# Altium PCB PCB.pcbdoc
Units mil, origin at the board's own origin, x right, y up, seen from the top; angles counter-clockwise.
Board outline 4690 x 5260 mil, 2 copper layers (Top Layer, Bottom Layer); 44 components, 55 nets, 158 pads, 60 vias.
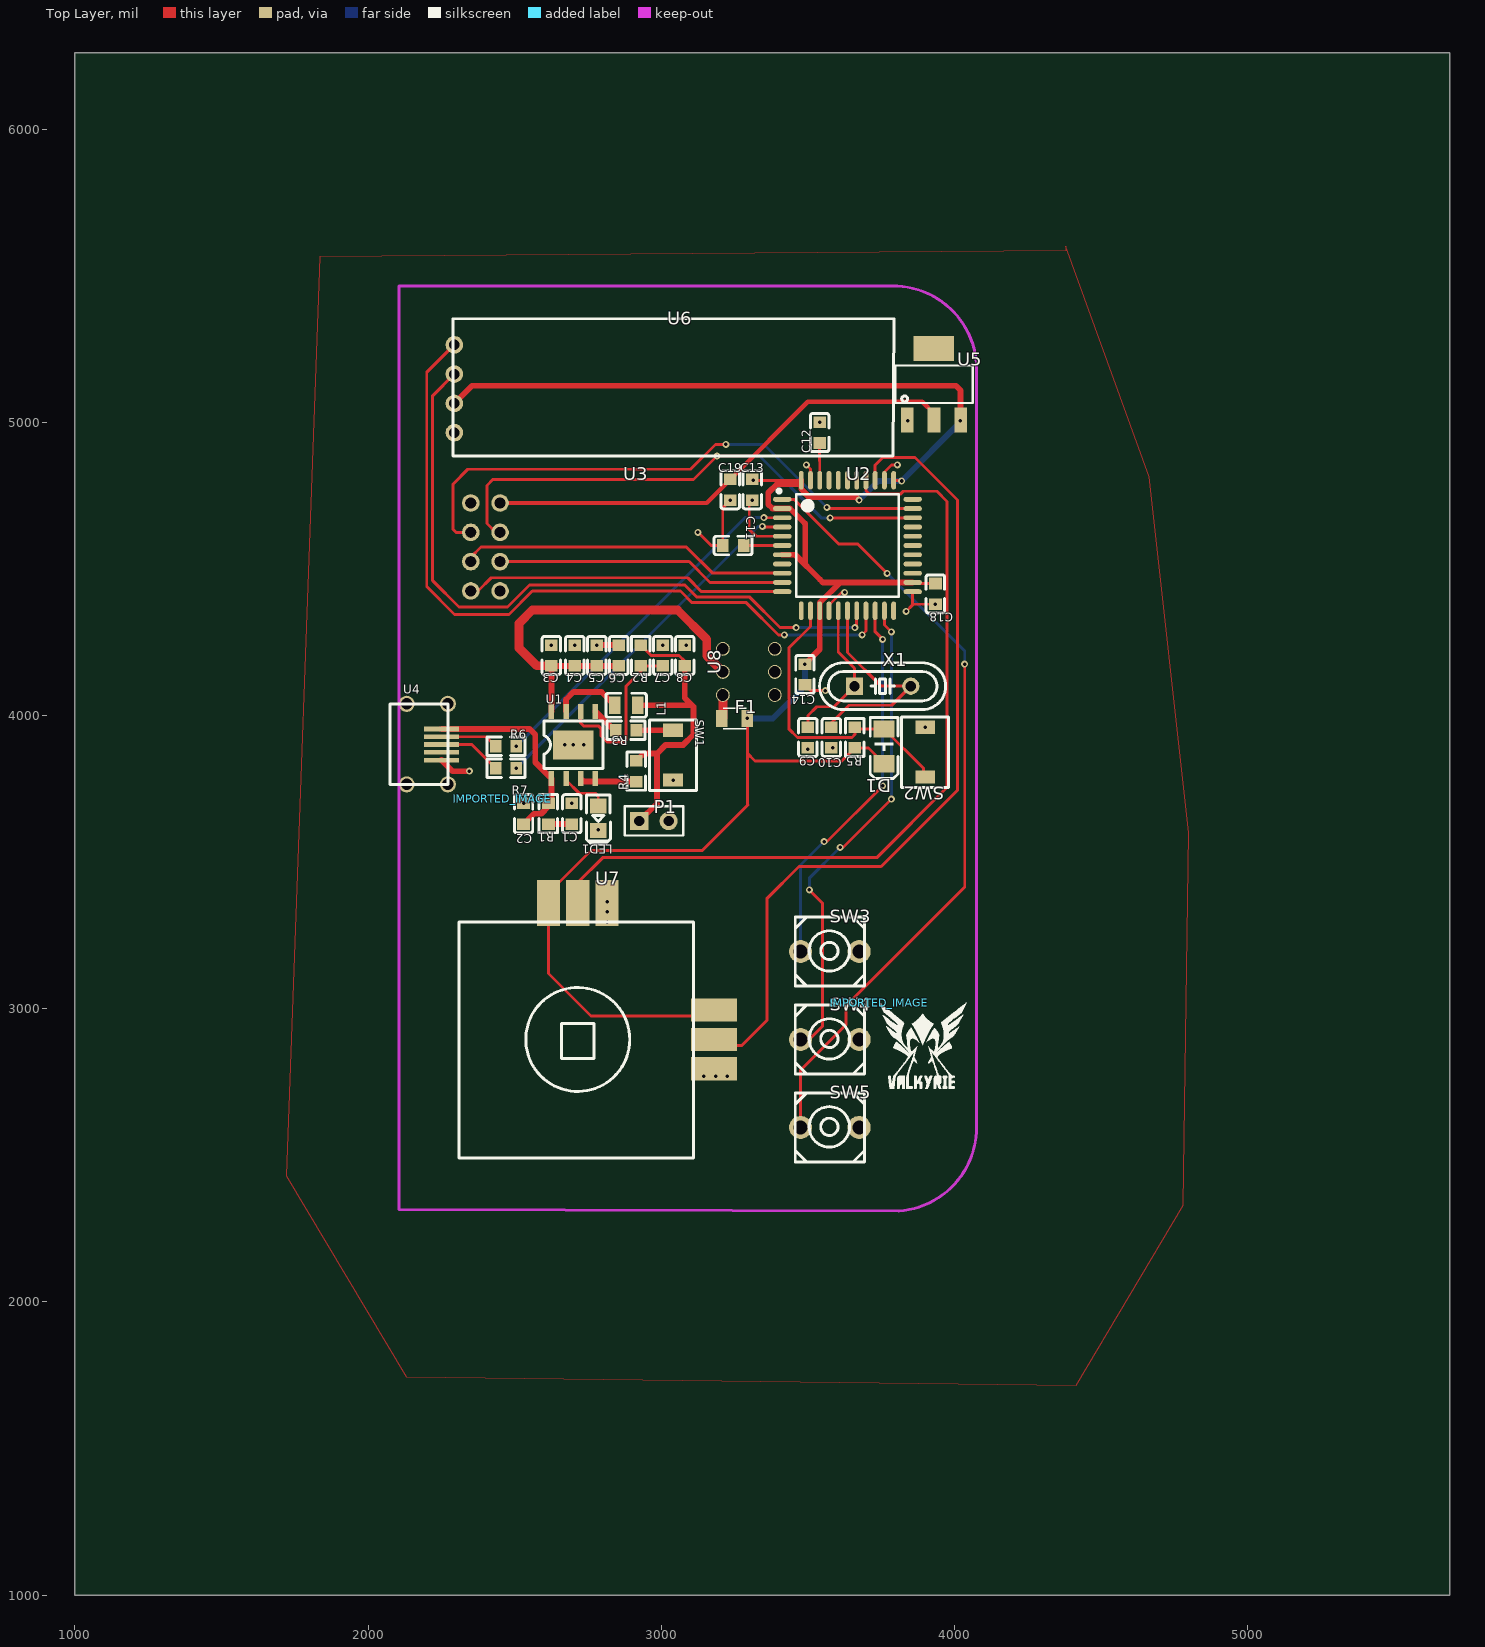
[diagram p0: Top Layer view]
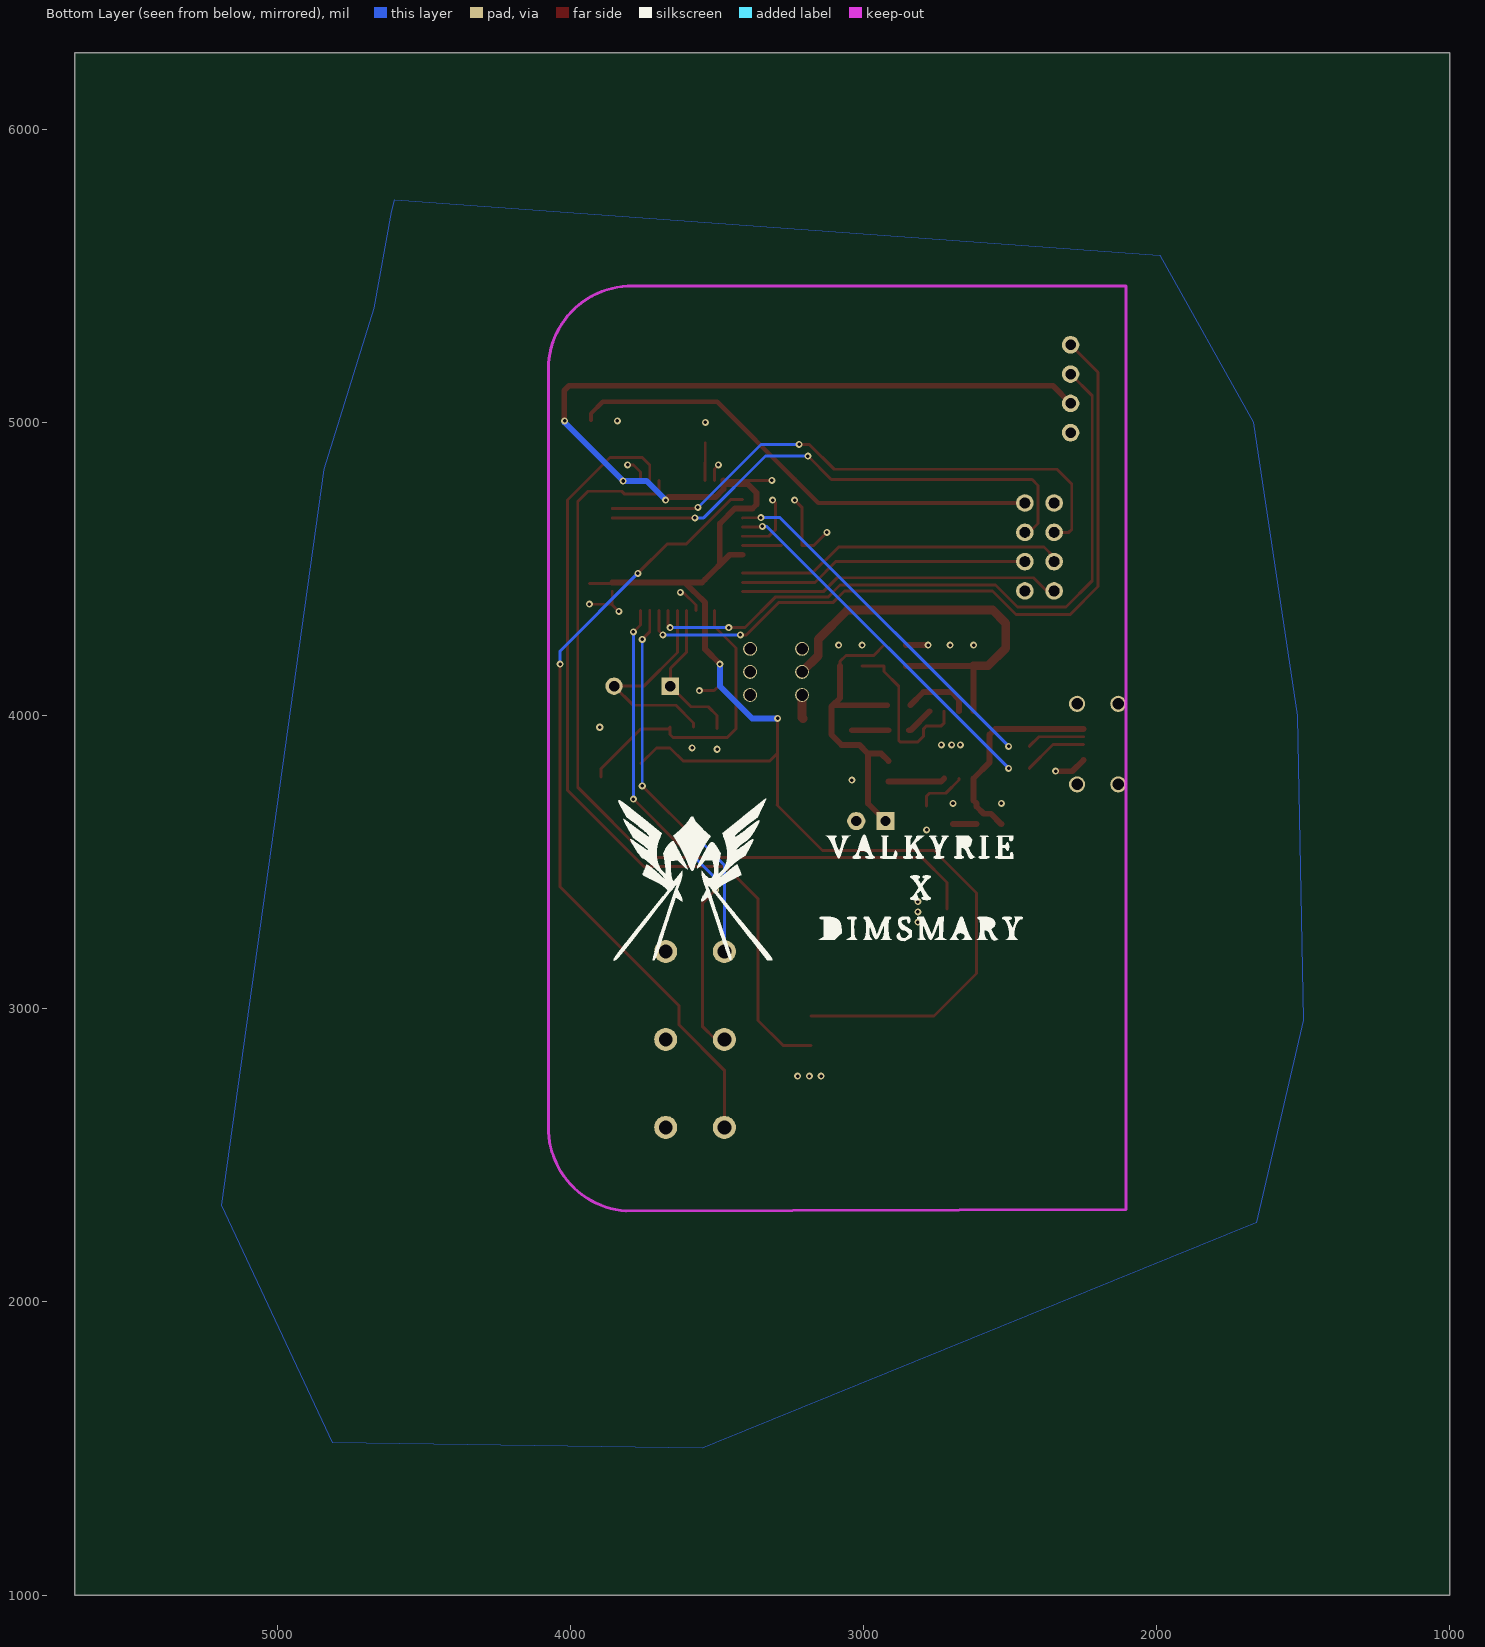
[diagram p1: Bottom Layer view, seen from below]

## Layer stack, top to bottom
Top Layer: signal copper (thickness not stored)
Dielectric: dielectric 12.6, FR-4, Dk 4.8
Bottom Layer: signal copper (thickness not stored)

## Board outline
5690,1000 1000,1000 1000,6260 5690,6260

## Components (designator, comment, footprint, x,y, rotation, side; value= is the part's Value field where it differs from the comment)
C1 "10u" C0603 2695,3665 r90 top
C2 "10u" C0603 2530,3665 r90 top
C3 "22u" C0603 2625,4205 r90 top
C4 "22u" C0603 2705,4205 r90 top
C5 "22u" C0603 2780,4205 r90 top
C6 "22u" C0603 2855,4205 r90 top
C7 "22u" C0603 3005,4205 r270 top
C8 "22u" C0603 3080,4205 r270 top
C9 "22p" C0603 3500,3925 r90 top
C10 "22p" C0603 3580,3925 r90 top
C11 "1u" C0603 3245,4580 r180 top
C12 "100n" C0603 3540,4965 r90 top
C13 "10u" C0603 3310,4770 r90 top
C14 "100n" C0603 3490,4140 r90 top
C18 "22U" C0603 3935,4415 r90 top
C19 "22U" C0603 3235,4770 r90 top
D1 "1N4448" LED1206-R-RD 3760,3895 r90 top
F1 "Glass tube fuse2A 3F 250VAC" FUSE_SMD1206_REFLOW 3250,3990 r0 top
IMPORTED_IMAGE "IMPORTED_IMAGE" IMPORTED_IMAGE 2457,3715.45 r0 top
IMPORTED_IMAGE "IMPORTED_IMAGE" IMPORTED_IMAGE 3743.57,3020.95 r0 top
L1 "1u" C0805 2880,4035 r0 top
LED1 "LTST-C170TBKT" LED-0805 2785,3650 r90 top
P1 "BAT" HDR-1X2/2.54 2975,3640 r0 top
R1 "2R" R0603 2615,3665 r270 top
R2 "0.5R" R0603 2930,4205 r90 top
R3 "10k" R0603 2880,3950 r180 top
R4 "1k" R0603 2915,3810 r270 top
R5 "10K" R0603 3660,3925 r270 top
R6 "22R" R0603 2470,3895 r0 top
R7 "22R" R0603 2470,3820 r0 top
SW1 "EVQ22705R" SMT_BUTTON 3040,3865 r0 top
SW2 "EVQ22705R" SMT_BUTTON 3900,3875 r0 top
SW3 "EVQ22705R" KEY-6.0*6.0-4 3575,3195 r0 top
SW4 "EVQ22705R" KEY-6.0*6.0-4 3575,2895 r0 top
SW5 "EVQ22705R" KEY-6.0*6.0-4 3575,2595 r0 top
U1 "IP5306" ESOP-8_L4.9-W3.9-P1.27-LS6.0-BL-EP 2700,3900 r0 top
U2 "ATMEGA32U4-AU" QFP-44_10X10X08P 3635,4580 r0 top
U3 "NRF24L01" NRF_ 2450,4625 r0 top
U4 "USB_PWR" MICROUSB 2075,4040 r0 top
U5 "ASM1117" SOT223 3930,5125 r0 top
U6 "SSD1306_128x32 I2C OLED 0.96\"" SSD1306_128X32 2290,4885 r0 top
U7 "Potentiometer_MICRO" POINTMERER_MICRO 2615,3295 r0 top
U8 "6FOOT_SWITCH" 6FOOT_SWITCH 3210,4070 r90 top
X1 "16MHz" HC-49S 3755,4100 r0 top

## Footprints (in the part's own frame and the unit in brackets; to place one, negate y for a bottom-side part, rotate by r counter-clockwise, add the part's x,y. Pads: shape width x height; smd on the part's side, far side on the other; paste and mask are expansions set on the pad)
6FOOT_SWITCH [mm]
  round 1.2 hole 1: 1(0,0) 2(2,0) ""(0,-4.5) ""(2,-4.5) ""(4,-4.5) ""(4,0)
C0603 [mm]
  rect 1x1.1 smd: 1(-0.9,0) 2(0.9,0)
  silkscreen extent -1.65,-0.8 1.65,0.8
C0805 [mm]
  rect 1x1.55 smd: 1(-1,0) 2(1,0)
  silkscreen extent -1.75,-1.04 1.75,1.04
ESOP-8_L4.9-W3.9-P1.27-LS6.0-BL-EP [mil]
  rect 18.9x51.18 smd: 1(-75,-114.5) 2(-25,-114.5) 3(25,-114.5) 4(75,-114.5) 5(75,114.5) 6(25,114.5) 7(-25,114.5) 8(-75,114.5)
  rect 137.8x98.42 smd: 9(0,0)
  silkscreen extent -100,-81 100,81
FUSE_SMD1206_REFLOW [mm]
  rect 1x1.5 smd: 1(-1.1,0) 2(1.1,0)
  silkscreen extent -1,-0.87 1,0.87
HC-49S [mm]
  rect 1.5x1.5 hole 0.9: 1(-2.438,0)
  round 1.5 hole 0.9: 2(2.438,0)
  silkscreen extent -5.46,-2.03 5.46,2.03
HDR-1X2/2.54 [mil]
  rect 62x62 hole 35: 1(-50,0)
  round 62 hole 35: 2(50,0)
  silkscreen extent -100,-49 100,50
IMPORTED_IMAGE [mil]
KEY-6.0*6.0-4 [mm]
  round 2 hole 1.2: 1(2.54,0) 2(-2.54,0)
  silkscreen extent -3,-3 3,3
LED1206-R-RD [mm]
  rect 1.5x1.8 smd: 1(1.5,0) 2(-1.5,0)
  silkscreen extent -2.8,-1.2 2.5,1.2
LED-0805 [mil]
  rect 51.2x55.1 smd: 1(41.35,0) 2(-41.35,0)
  silkscreen extent -88,-41 78,40
MICROUSB [mm]
  rect 3x0.4 smd: 1(4.445,-2.178) 2(4.445,-2.853) 3(4.445,-3.528) 4(4.445,-4.203) 5(4.445,-4.878)
  round 1.4 hole 1: ""(1.428,-6.985) ""(1.428,0) ""(5,-6.985) ""(5,0)
  silkscreen extent 0,-7 5,0
NRF_ [mil]
  round 60 hole 36 slot 36.2 at 0 deg: 1(-100,100) 2(0,100) 3(-100,0) 4(0,0) 5(-100,-100) 6(0,-100) 7(-100,-200) 8(0,-200)
POINTMERER_MICRO [mm]
  rect 2x4 smd: 1(0,1.651) 2(2.54,1.651) 3(5.08,1.651)
  rect 4x2 smd: 4(14.351,-7.62) 5(14.351,-10.16) 6(14.351,-12.7)
  silkscreen extent -7.75,-20.45 12.57,0
QFP-44_10X10X08P [mm]
  oval 1.597x0.42 smd: 1(-5.65,4) 2(-5.65,3.2) 3(-5.65,2.4) 4(-5.65,1.6) 5(-5.65,0.8) 6(-5.65,0) 7(-5.65,-0.8) 8(-5.65,-1.6) 9(-5.65,-2.4) 10(-5.65,-3.2) 11(-5.65,-4) 23(5.65,-4) 24(5.65,-3.2) 25(5.65,-2.4) 26(5.65,-1.6) 27(5.65,-0.8) 28(5.65,0) 29(5.65,0.8) 30(5.65,1.6) 31(5.65,2.4) 32(5.65,3.2) 33(5.65,4)
  oval 0.42x1.597 smd: 12(-4,-5.65) 13(-3.2,-5.65) 14(-2.4,-5.65) 15(-1.6,-5.65) 16(-0.8,-5.65) 17(0,-5.65) 18(0.8,-5.65) 19(1.6,-5.65) 20(2.4,-5.65) 21(3.2,-5.65) 22(4,-5.65) 34(4,5.65) 35(3.2,5.65) 36(2.4,5.65) 37(1.6,5.65) 38(0.8,5.65) 39(0,5.65) 40(-0.8,5.65) 41(-1.6,5.65) 42(-2.4,5.65) 43(-3.2,5.65) 44(-4,5.65)
  silkscreen extent -6.08,-4.45 4.45,4.87
R0603 [mm]
  rect 1x1.1 smd: 1(-0.9,0) 2(0.9,0)
  silkscreen extent -1.65,-0.8 1.65,0.8
SMT_BUTTON [mil]
  rect 66.93x45.28 smd: 1(0,85) 2(0,-85)
  silkscreen extent -80,-120 80,120
SOT223 [mil]
  rect 43x85 smd: 1(-91,-117) 2(0,-117) 3(91,-117)
  rect 138x85 smd: 4(0,127)
  silkscreen extent -132,-59 132,69
SSD1306_128X32 [mil]
  round 60 hole 36: 1(3.9,379.7) 2(3.9,279.7) 3(3.9,179.7) 4(3.9,79.7)
  silkscreen extent 0,0 1504,468

## Via types
v1: diameter 24, hole 12, Top Layer to Bottom Layer, 60 vias

## Nets (pads, with @x,y where several pads share a name; then routed paths per layer and width w, separated by ;. In a path a pad name is that pad's centre, name@x,y a point inside that pad or via, vN(x,y) a via of type N, cw(c..) or ccw(c..) an arc to the next point about the centre after c; other vN are vias at no path point)
3.3V: C19.2 U3.2 U5.2 | length 1661.6
  Top Layer w15: U3.2 3155,4725 C19.2 3499.6,5070 3890,5070 3930,5030 U5.2
5V: C13.2 C14.2 C18.2 D1.2 F1.2 R5.2 U2.2 U2.7 U2.14 U2.24 U2.34 U2.44 U5.3 U6.3 U7.1 U7.4 | length 7098
  Top Layer w10: U7.4@3180,2975 2760,2975 2615,3120 2615,3340 2615,3395 2760,3540 3140,3540 3295,3695 3293.31,3696.69 v1(3293.31,3990) 3293.31,3871.69 3320,3845 3615.44,3845 R5.2 3706.38,3889.56 D1.2 ; C13.2 v1(3313,4802.44) U2.44 ; U2.34 3817.56,4802.44 v1(3820,4800) ; U2.24 3861.02,4450.44 C18.2
  Top Layer w20: U6.3 2354.2,5125 4005,5125 4021,5109 U5.3 ; U2.7 3456.5,4548.5 3541,4464 3551,4454 3640.2,4454 ; C14.2 3540.51,4225.95 U2.14 ; 3490.78,4514.22 3490.78,4645.78 3490,4655 3439.02,4705.98 U2.2 3379.02,4705.98 3365,4720 3365,4760 3395,4790 3465.08,4790 U2.44 3477.52,4772.48 3505,4745 3665,4745 v1(3675,4735) ; U2.14 3540.5,4385.5 3611,4454 U2.24
  Bottom Layer w20: v1(3293.31,3990) 3380,3990 3490,4100 v1(3490,4175) ; v1(3675,4735) 3740,4800 v1(3820,4800) 4020,5000 v1(4020,5005)
A0: U2.36 U7.5 | length 2826.7
  Top Layer w10: U7.5@3180,2875 3275,2875 3360,2960 3360,3375 3470,3485 3750,3485 4010,3745 4010,4735 3865,4880 3755,4880 3729.5,4854.5 U2.36
A1: U2.37 U7.2 | length 2795.7
  Top Layer w10: U7.2@2715,3340 2715,3430 2800,3515 3735,3515 3975,3755 3975,4730 3940,4765 3825,4765 3815,4755 3710,4755 3697.99,4767.01 U2.37
BAT+: C8.2 L1.2 P1.1 R2.2 R4.1 | length 1108
  Top Layer w10: R2.2 2965.43,4205 3060,4205 3080,4185 C8.2
  Top Layer w20: R4.1 2939.56,3870 2985,3870 ; L1.2 3105,4035 ; P1.1 2985,3700 2985,3870 ; C8.2 3080,4060 3105,4035 ; 2985,3870 3015,3900 3075,3900 3110,3935 3110,4030 3105,4035
D0: SW3.2 U2.20 | length 1295
  Top Layer w10: v1(3555,3570) 3565,3570 v1(3755,3760) ; U2.20 3729.49,4285.51 v1(3755,4260)
  Bottom Layer w10: SW3.2 3475,3490 v1(3555,3570) ; v1(3755,3760) v1(3755,4260)
D1: SW4.2 U2.21 | length 1661.6
  Top Layer w10: SW4.2 3505,2895 3550,2940 3550,3360 v1(3505,3405) ; v1(3610,3550) 3620,3550 v1(3785,3715) ; U2.21 3760.98,4309.02 v1(3785,4285)
  Bottom Layer w10: v1(3505,3405) 3505,3445 v1(3610,3550) ; v1(3785,3715) v1(3785,4285)
D4: U2.25
D5: U2.31 U3.4 | length 1768.5
  Top Layer w10: U3.4 2435,4625 2405,4655 2405,4785 2425,4805 3110,4805 v1(3190,4885) ; v1(3575.51,4674.49) U2.31
  Bottom Layer w10: v1(3190,4885) 3335,4885 3545.5,4674.5 v1(3575.51,4674.49)
D7: SW5.2 U2.1 | length 2693.7
  Top Layer w10: U2.1 3452.52,4737.48 3605,4585 3670,4585 v1(3770,4485) ; SW5.2 3475,2790 3630,2945 3630,3010 4035,3415 v1(4035,4175)
  Bottom Layer w10: v1(3770,4485) 4035,4220 v1(4035,4175)
D9: U2.29
D13: U2.32 U3.3 | length 1933.2
  Top Layer w10: U3.3 2300,4625 2290,4635 2290,4790 2340,4840 3100,4840 3185,4925 v1(3220,4925) ; v1(3565,4710) 3569.02,4705.98 U2.32
  Bottom Layer w10: v1(3220,4925) 3350,4925 v1(3565,4710)
DATA_M: R6.2 U2.3 | length 1230.7
  Top Layer w10: v1(3350,4675) U2.3
  Bottom Layer w10: v1(2505,3895) 3285,4675 v1(3350,4675)
DATA_P: R7.2 U2.4 | length 1250.1
  Top Layer w10: v1(3345,4645) 3347.01,4642.99 U2.4
  Bottom Layer w10: v1(2505,3820) 3330,4645 v1(3345,4645)
GND: C1.2 C2.2 C3.2 C4.2 C5.2 C6.2 C7.1 C8.1 C9.1 C10.1 C11.2 C12.2 C13.1 C14.1 C18.1 C19.1 LED1.2 P1.2 SW1.2 SW2.1 SW3.1 SW4.1 SW5.1 U1.9 U2.5 U2.15 U2.23 U2.35 U2.43 U3.1 U4.5 U5.1 U6.4 U7.3 U7.6 | length 1176.3
  Top Layer w10: v1(3125,4625) 3170,4580 C11.2 3209.56,4709.13 C19.1 ; C13.1 3300,4724.57 3300,4635 3323.5,4611.5 U2.5 ; C14.1 3509.57,4085 v1(3560,4085) ; v1(3495,4855) 3509.02,4840.98 U2.43 ; U2.15 3572.01,4377.01 3615,4420 v1(3625,4420) ; U2.35 3760.98,4830.98 3785,4855 v1(3805,4855) ; U2.23 3857.44,4377.44 v1(3835,4355) 3859.57,4379.57 C18.1
  Top Layer w20: U4.5 2287.95,3810 v1(2345,3810) ; C5.2 C6.2
  other v1: 3145,2770 3185,2770 3225,2770 2815,3295 2815,3330 2815,3365 2785,3610 2530,3700 2695,3700 3040,3780 3500,3885 3585,3890 2670,3900 2700,3900 2735,3900 3900,3960 2625,4240 2705,4240 2780,4240 3005,4240 3085,4240 3935,4380 3235,4735 3310,4735 3540,5000 3840,5005
ICO: C3.1 C4.1 C5.1 C6.1 U1.8 U8.2 | length 1439.2
  Top Layer w20: U1.8 C3.1 C6.1
  Top Layer w30: C3.1 2575.43,4169.56 2515,4230 2515,4315 2560,4360 3055,4360 3155,4260 3155,4203.74 U8.2
MISO: U2.11 U3.7 | length 1100.9
  Top Layer w10: U3.7 2375,4425 2420,4470 3090,4470 3137.48,4422.52 U2.11
MOSI: U2.10 U3.6 | length 992
  Top Layer w10: U3.6 3095,4525 3165.98,4454.02 U2.10
R1_2: C1.1 R1.2 | length 80
  Top Layer w20: R1.2 C1.1
RST: D1.1 R5.1 SW2.2 U2.13 | length 1022.8
  Top Layer w10: U2.13 3509.02,4304.02 3435,4230 3435,3955 3465,3925 3650,3925 3660,3935 R5.1 3666.38,3954.05 D1.1 3895,3819.05 SW2.2@3895,3790
S$18: 
S$20: 
S$1571: 
S$1771: 
SCL: U2.18 U6.2 | length 2364
  Top Layer w10: U6.2 2220,5090.8 2220,4460 2310,4370 2475,4370 2550,4445 3080,4445 3120,4405 3300,4405 3405,4300 v1(3460,4300) ; v1(3660,4300) 3666.5,4306.5 U2.18
  Bottom Layer w10: v1(3460,4300) v1(3660,4300)
SCLK: U2.9 U3.5 | length 1128.9
  Top Layer w10: U3.5 2350,4540 2385,4575 3085,4575 3175.5,4485.5 U2.9
SDA: U2.19 U6.1 | length 2571.2
  Top Layer w10: U6.1 2200,5170.8 2200,4440 2295,4345 2480,4345 2560,4425 3065,4425 3105,4385 3290,4385 3400,4275 v1(3420,4275) ; v1(3685,4275) 3697.99,4287.99 U2.19
  Bottom Layer w10: v1(3420,4275) v1(3685,4275)
SW1_1: R3.1 SW1.1 | length 124.6
  Top Layer w20: R3.1 SW1.1
U1_2: LED1.1 U1.2 | length 171.9
  Top Layer w10: U1.2 2675,3780 2720,3735 2775,3735 2785,3725 LED1.1
U1_3: R4.2 U1.3 U1.4 | length 194.5
  Top Layer w20: U1.3 2735.93,3774.57 R4.2
U1_5: R3.2 U1.5 | length 96.3
  Top Layer w20: U1.5 2839.5,3950 R3.2
U1_6: C7.2 R2.1 U1.6 | length 588.4
  Top Layer w10: U1.6 2725,3975 2735,3965 2785,3965 2795,3955 2795,3930 2815,3910 2875,3910 2880,3915 2880,4100 2930,4150 R2.1 C7.2
U1_7: L1.1 U1.7 | length 235.1
  Top Layer w20: U1.7 2675,4055 2700,4080 2795.63,4080 L1.1
U2_6: C11.1 U2.6 | length 132.1
  Top Layer w10: C11.1 U2.6
U2_8: U2.8
U2_12: U2.12
U2_16: C9.2 U2.16 X1.1 | length 525.5
  Top Layer w10: C9.2@3500,3955.44 3500,4000 3530,4030 3589,4030 X1.1 3659,4161 3603.5,4216.5 U2.16
U2_17: C10.2 U2.17 X1.2 | length 743.5
  Top Layer w10: C10.2 3580,3975 3640,4035 3786,4035 X1.2 3750,4100 3635,4215 U2.17
U2_22: U2.22
U2_26: U2.26
U2_27: U2.27
U2_28: U2.28
U2_30: U2.30
U2_33: U2.33
U2_38: U2.38
U2_39: U2.39
U2_40: U2.40
U2_41: U2.41
U2_42: C12.1 U2.42 | length 127.2
  Top Layer w10: C12.1 U2.42
U3_8: U3.8
U4_2: R6.1 U4.2 | length 198.1
  Top Layer w10: U4.2 2401.89,3927.68 R6.1
U4_3: R7.1 U4.3 | length 218.2
  Top Layer w10: U4.3 2353.47,3901.1 R7.1
U4_4: U4.4
VIN: C2.1 R1.1 U1.1 U4.1 | length 710.2
  Top Layer w20: U4.1@2250,3954.25 2550.75,3954.25 2570,3935 2570,3840.5 U1.1 2625,3710.44 R1.1 2615,3689.57 2590.43,3665 2565.44,3665 C2.1
VOUT: F1.1 U8.1 | length 81.4
  Top Layer w30: F1.1 3210,3993.31 U8.1
pads on no net: U4. U5.4 U8.

## Polygon pours and split planes (outlines as drawn)
GND on Top Layer (solid): 1835,5565 1720,2430 2130,1745 4415,1715 4780,2330 4800,3600 4665,4815 4380,5600 4380,5585
GND on Bottom Layer (solid): 1990,5570 1670,5000 1520,4000 1500,2960 1660,2270 3550,1500 4810,1520 5190,2330 4840,4840 4670,5390 4610,5720 4600,5760

## Keep-outs
Keep-Out Layer:
  lines w10: 3805,5465 cw(c3790.48,5180.15) 4075,5200 ; 3810,2310 ccw(c3790.16,2594.52) 4075,2580

## Text inside footprints (layer, text, board x,y; h text height)
U6: Document "SDA" at 2343.9,5224.7 h80; Document "SCL" at 2343.9,5124.7 h80; Document "VCC" at 2343.9,5024.7 h80; Document "GND" at 2343.9,4924.7 h80